# EAGLE board basicUno (EAGLE 6.5.0)
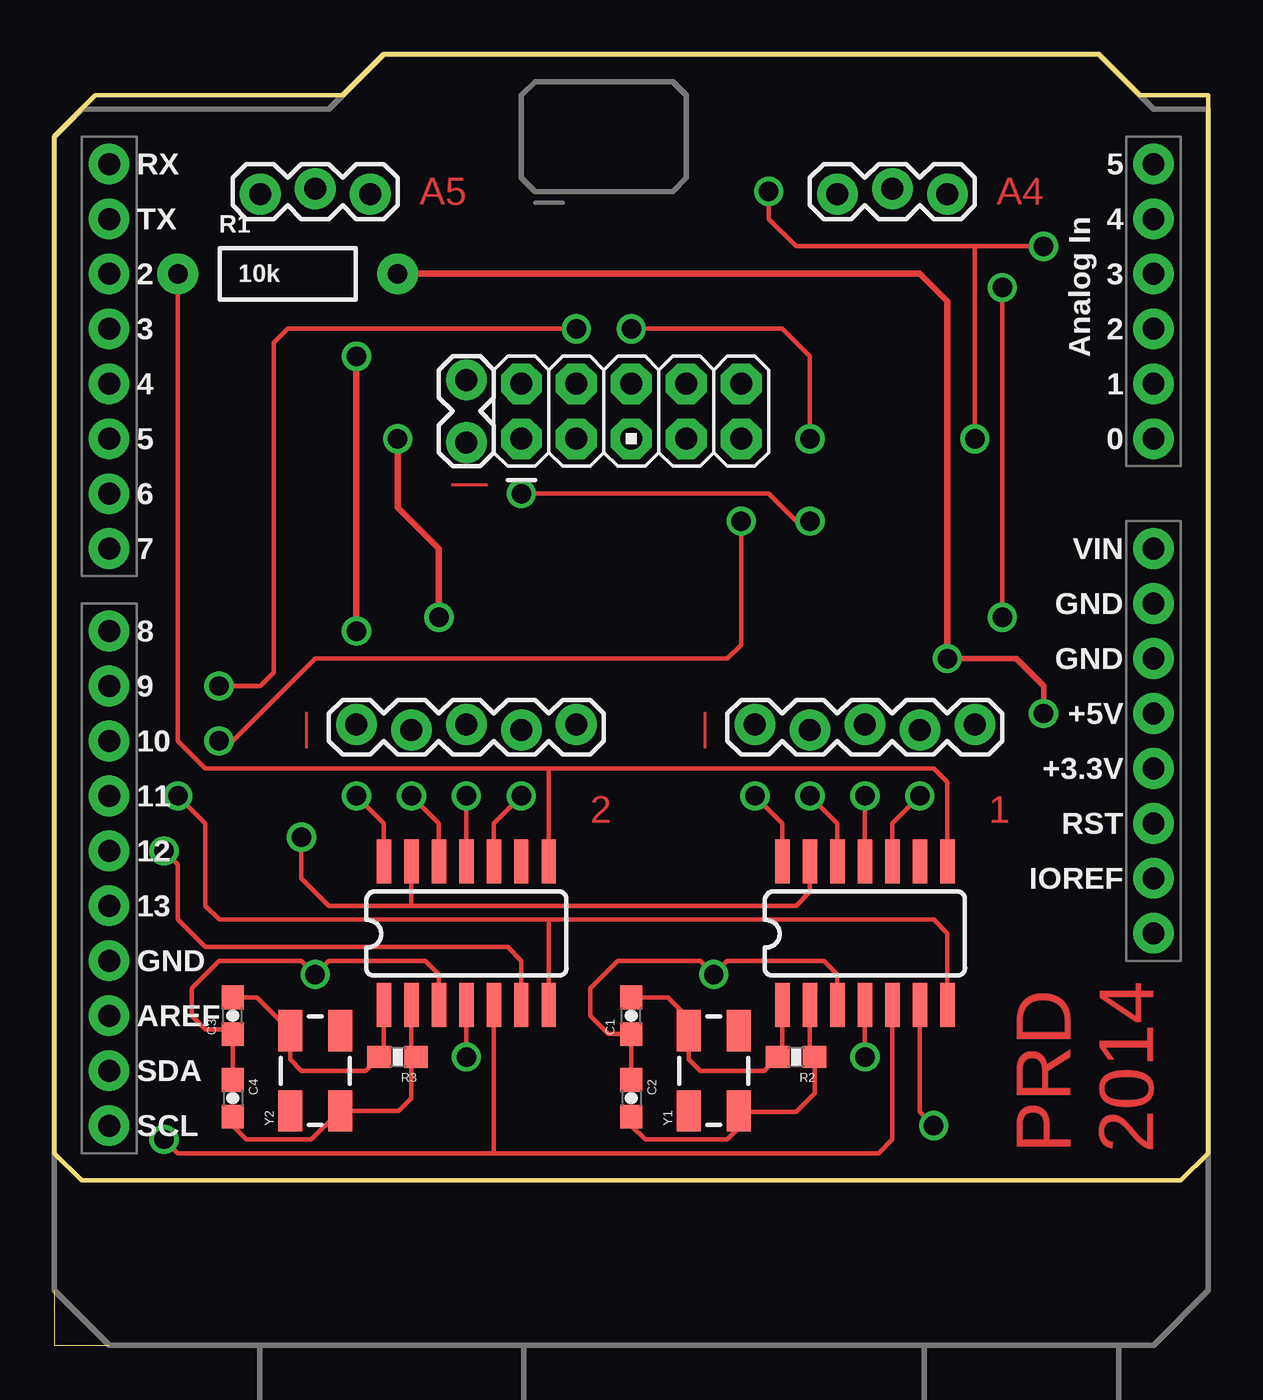
[diagram p0: board, top side]
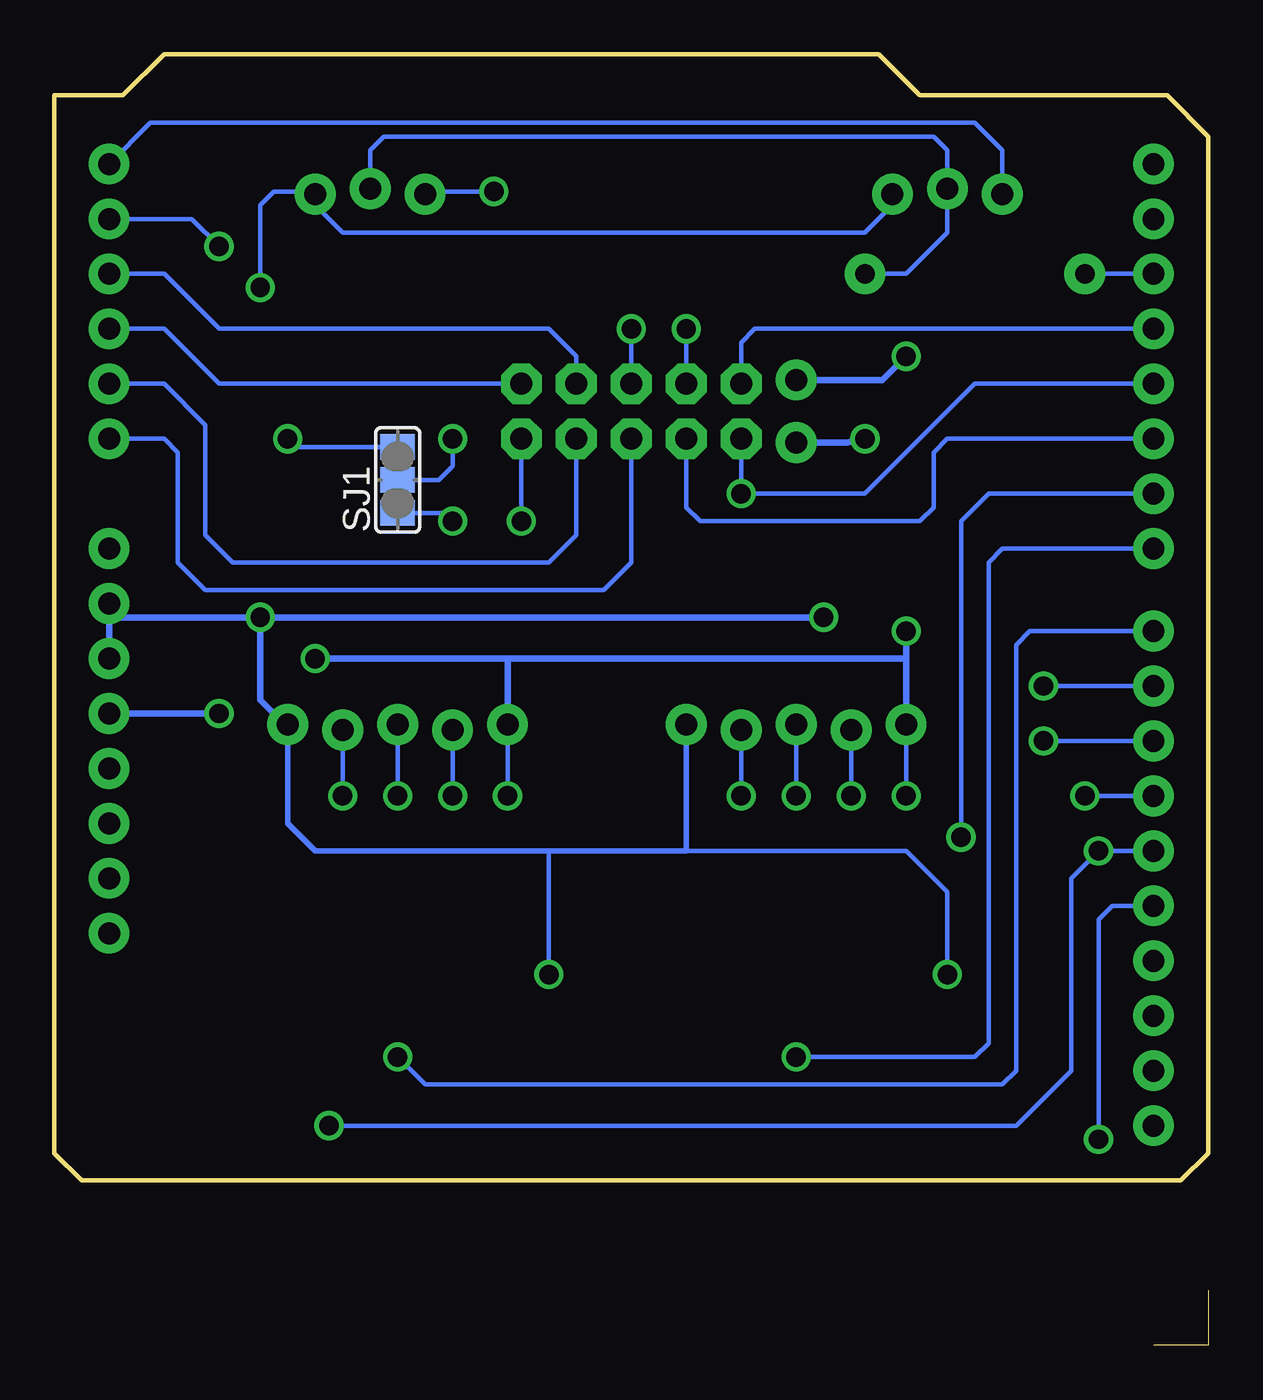
[diagram p1: board, bottom side, seen from below]

Size 53.34 x 59.69 mm. Coordinates in mm from the lower left corner, seen from the top.
Outline: 2.54,0 0,0 0,2.54
Outline: 0,8.89 0,55.88 1.91,57.78 13.34,57.78 15.24,59.69 48.26,59.69 50.16,57.78 53.34,57.78 53.34,8.89 52.07,7.62 1.27,7.62 0,8.89
Copper layers (1*16): Top 0.0356mm / dielectric 1.5011mm / Bottom 0.0356mm
Design rules "oshPark": minimum track width 6mil, minimum drill 13mil, track to track 6mil, track to pad 6mil, pad to pad 6mil, via to via 6mil, smd to smd 6mil, copper to edge 15mil, drill to drill 6mil, minimum pad ring 7mil, minimum via ring 7mil, stop-mask expansion 3mil, vias tented up to drill 0mil, thermal gap 10mil

## Footprints (pad centres in the part's own frame; a part is rotated, then mirrored left to right if it is on the bottom)
0603-CAP = smd 1.1 x 1: 1 -0.85,0; 2 0.85,0
1X05_LOCK = drill 1.016 pad 1.88: 1 0,0.127; 2 2.54,-0.127; 3 5.08,0.127; 4 7.62,-0.127; 5 10.16,0.127
AVR_ICSP = drill 1.016 pad 1.88 octagon: 1 -1.27,5.08; 2 1.27,5.08; 3 -1.27,2.54; 4 1.27,2.54; 5 -1.27,0; 6 1.27,0; 7 -1.27,-2.54; 8 1.27,-2.54; 9 -1.27,-5.08; 10 1.27,-5.08
1X02_LOCK = drill 1.016 pad 1.88: 1 -0.178,0; 2 2.718,0
1X03_LOCK = drill 1.016 pad 1.88: 1 0,0.127; 2 2.54,-0.127; 3 5.08,0.127
AXIAL-0.4 = drill 0.9 pad 1.88: P$1 -5.08,0; P$2 5.08,0
0603-RES = smd 1.1 x 1: 1 -0.85,0; 2 0.85,0
SJ_2 = smd 1.168 x 1.6: 1 -1.524,0; 2 0,0; 3 1.524,0
SOIC14 = smd 2.032 x 0.66: 1 -3.315,4.445; 2 -3.315,3.175; 3 -3.315,1.905; 4 -3.315,0.635; 5 -3.315,-0.635; 6 -3.315,-1.905; 7 -3.315,-3.175; 8 3.315,-3.175; 9 3.315,-1.905; 10 3.315,-0.635; 11 3.315,0.635; 12 3.315,1.905; 13 3.315,3.175; 14 3.315,4.445
UNO_R3_SHIELD = drill 1.016 pad 1.88: 3.3V 50.8,26.67; 5V 50.8,29.21; A0 50.8,41.91; A1 50.8,44.45; A2 50.8,46.99; A3 50.8,49.53; A4 50.8,52.07; A5 50.8,54.61; AREF 2.54,15.24; D2 2.54,49.53; D3 2.54,46.99; D4 2.54,44.45; D5 2.54,41.91; D6 2.54,39.37; D7 2.54,36.83; D8 2.54,33.02; D9 2.54,30.48; D10 2.54,27.94; D11 2.54,25.4; D12 2.54,22.86; D13 2.54,20.32; GND@0 50.8,31.75; GND@1 50.8,34.29; GND@2 2.54,17.78; IOREF 50.8,21.59; NC 50.8,19.05; RES 50.8,24.13; RX 2.54,54.61; SCL 2.54,10.16; SDA 2.54,12.7; TX 2.54,52.07; VIN 50.8,36.83
CRYSTAL-SMD-5X3 = smd 1.9 x 1.1: 1 -1.85,-1.15; 2 1.85,-1.15; 3 1.85,1.15; 4 -1.85,1.15

## Placement (x,y rotation side)
C1  18pF  [0603-CAP]  26.67,15.24 90 top
C2  18pF  [0603-CAP]  26.67,11.43 270 top
C3  18pF  [0603-CAP]  8.26,15.24 90 top
C4  18pF  [0603-CAP]  8.26,11.43 270 top
JP1  EN1  [1X05_LOCK]  32.38,28.57 0 top
JP2  EN2  [1X05_LOCK]  13.97,28.57 0 top
JP3  M05X2PTH  [AVR_ICSP]  26.67,43.18 90 top
JP4  M02LOCK  [1X02_LOCK]  19.05,44.45 270 top
JP5  A4  [1X03_LOCK]  41.27,53.34 180 top
JP6  A5  [1X03_LOCK]  14.61,53.34 180 top
R1  10k  [AXIAL-0.4]  10.79,49.53 0 top
R2  1M  [0603-RES]  34.29,13.34 180 top
R3  1M  [0603-RES]  15.88,13.34 180 top
SJ1  [SJ_2]  37.47,40.01 90 bottom
U$1  LS7366R  [SOIC14]  38.1,19.05 90 top
U$2  LS7366R  [SOIC14]  19.68,19.05 90 top
U$3  ARDUINO_R3_SHIELD  [UNO_R3_SHIELD]  0,0 0 top
Y1  40MHz  [CRYSTAL-SMD-5X3]  30.48,12.7 90 top
Y2  40MHz  [CRYSTAL-SMD-5X3]  12.06,12.7 90 top

## Library data of the parts
C1-C4 R1-R3 SJ1 = SparkFun-Passives
JP1-JP6 = SparkFun-Connectors
U$1 U$2 = dCustom
U$3 = SparkFun-Boards
Y1 Y2 = SparkFun-FreqCtrl

## Nets
5V: JP1.1 JP2.1 JP4.1 JP5.2 JP6.2 R1.P$2 U$1.14 U$2.14 U$3.5V
!FLAG: R1.P$1 U$1.8 U$2.8 U$3.D2
!SS1: U$1.4 U$3.D8
!SS2: U$2.4 U$3.D7
A4: JP5.3 SJ1.3 U$3.A4
A5: JP6.3 U$3.A5
CNT_EN: U$1.13 U$2.13 U$3.D6
GND: C1.1 C2.1 C3.1 C4.1 JP1.5 JP2.5 JP4.2 JP5.1 JP6.1 U$1.3 U$2.3 U$3.GND@0 U$3.GND@1
M1CS: JP3.5 U$3.A0
M1EN: JP3.1 SJ1.1 U$3.D4
M1INA: JP3.2 U$3.D3
M1INB: JP3.3 U$3.D5
M1PWM: JP3.4 U$3.D9
M2CS: JP3.10 U$3.A2
M2EN: JP3.6 SJ1.2
M2INA: JP3.7 U$3.A1
M2INB: JP3.8 U$3.A3
M2PWM: JP3.9 U$3.D10
MISO: U$1.6 U$2.6 U$3.D12
MOSI: U$1.7 U$2.7 U$3.D11
N$1: JP1.2 U$1.12
N$2: JP1.3 U$1.11
N$3: JP1.4 U$1.10
N$5: JP2.2 U$2.12
N$6: JP2.3 U$2.11
N$7: JP2.4 U$2.10
N$8: C1.2 R2.2 U$1.1 Y1.3
N$9: C2.2 R2.1 U$1.2 Y1.1
N$12: C3.2 R3.2 U$2.1 Y2.3
N$13: C4.2 R3.1 U$2.2 Y2.1
SCK: U$1.5 U$2.5 U$3.D13

## Tracks (layer width: path | path; a pad name or v marks a point on that pad's centre or on a via)
5V  (via drill 0.9)
  Top 0.203: v13.97,25.4 15.24,24.13 U$2.14 | v32.38,25.4 33.66,24.13 U$1.14
  Top 0.254: v41.27,31.75 44.45,31.75 45.72,30.48 v45.72,29.21
  Top 0.305: R1.P$2 40.01,49.53 41.27,48.26 v41.27,31.75 | v13.97,45.72 v13.97,33.02
  Bottom 0.203: JP2.1 v13.97,25.4 | JP1.1 v32.38,25.4 | R1.P$2 13.97,49.53 12.06,51.44 JP6.2 12.06,55.24 12.7,55.88 38.1,55.88 38.73,55.24 JP5.2
  Bottom 0.305: JP2.1 13.97,31.75 | 13.97,31.75 v13.97,33.02 | U$3.5V v45.72,29.21 | JP4.1 15.06,44.63 v13.97,45.72 | v41.27,31.75 32.38,31.75 | 32.38,31.75 13.97,31.75 | JP1.1 32.38,31.75
!FLAG
  Top 0.203: R1.P$1 5.71,27.94 6.99,26.67 22.86,26.67 | U$1.8 41.27,26.04 40.64,26.67 22.86,26.67 | U$2.8 22.86,26.67
  Bottom 0.203: R1.P$1 U$3.D2
!SS1  (via drill 0.9)
  Top 0.203: U$1.4 v37.47,13.34
  Bottom 0.203: U$3.D8 8.26,33.02 8.89,32.38 8.89,12.7 9.53,12.06 36.2,12.06 v37.47,13.34
!SS2  (via drill 0.9)
  Top 0.203: U$2.4 v19.05,13.34
  Bottom 0.203: U$3.D7 9.53,36.83 10.16,36.2 10.16,13.97 10.79,13.34 v19.05,13.34
A4  (via drill 0.9)
  Top 0.203: v45.72,50.8 42.55,50.8 | 42.55,50.8 34.29,50.8 33.02,52.07 v33.02,53.34 | v42.55,41.91 42.55,50.8
  Bottom 0.203: U$3.A4 46.99,52.07 v45.72,50.8 | v33.02,53.34 36.07,53.34 JP5.3 | SJ1.3 42.16,41.53 v42.55,41.91
A5
  Bottom 0.203: JP6.3 9.53,55.24 10.79,56.52 48.9,56.52 U$3.A5
CNT_EN  (via drill 0.9)
  Top 0.203: 16.51,20.32 34.29,20.32 34.92,20.95 U$1.13 | U$2.13 16.51,20.32 | 16.51,20.32 12.7,20.32 11.43,21.59 v11.43,23.5
  Bottom 0.203: v11.43,23.5 11.43,38.1 10.16,39.37 U$3.D6
GND  (via drill 0.9)
  Top 0.203: v43.81,48.9 v43.81,33.66 | 36.2,16.51 U$1.3 36.2,17.14 35.56,17.78 31.11,17.78 v30.48,17.14 29.84,17.78 26.04,17.78 24.77,16.51 24.77,15.24 25.61,14.39 C1.1 C2.1 | C4.1 C3.1 8.04,14.61 6.99,14.61 6.35,15.24 6.35,16.51 7.62,17.78 11.43,17.78 v12.06,17.14 12.7,17.78 17.14,17.78 17.78,17.14 U$2.3
  Top 0.305: v15.88,41.91 15.88,38.73 17.78,36.83 v17.78,33.66
  Bottom 0.203: JP6.1 14.61,52.7 15.88,51.44 40.01,51.44 41.27,52.7 JP5.1 41.4,53.34 43.18,53.34 43.81,52.7 v43.81,48.9 | v12.06,17.14 12.06,20.95 13.97,22.86 24.13,22.86 | v30.48,17.14 30.48,22.86
  Bottom 0.254: JP1.5 42.55,24.13 41.27,22.86 30.48,22.86 24.13,22.86 JP2.5
  Bottom 0.305: v17.78,33.66 v43.81,33.66 | 50.8,33.66 U$3.GND@0 | JP4.2 16.69,41.73 v15.88,41.91 | JP1.5 42.67,28.7 43.81,29.84 v43.81,33.66 | U$3.GND@1 50.8,33.66 | 50.8,33.66 v43.81,33.66
M1CS
  Bottom 0.203: U$3.A0 48.26,41.91 47.62,41.27 47.62,36.2 46.35,34.92 27.94,34.92 26.67,36.2 JP3.5
M1EN  (via drill 0.9)
  Top 0.203: v34.92,38.1 34.29,38.1 33.02,39.37 v21.59,39.37
  Bottom 0.203: U$3.D4 10.79,44.45 15.88,39.37 v21.59,39.37 JP3.1 | SJ1.1 35.31,38.48 v34.92,38.1
M1INA
  Bottom 0.203: JP3.2 21.59,46.35 20.95,46.99 U$3.D3
M1INB
  Bottom 0.203: U$3.D5 12.06,41.91 12.7,41.27 12.7,38.73 13.34,38.1 23.5,38.1 24.13,38.73 JP3.3
M1PWM  (via drill 0.9)
  Top 0.203: v7.62,30.48 9.53,30.48 10.16,31.11 10.16,46.35 10.79,46.99 v24.13,46.99
  Bottom 0.203: U$3.D9 v7.62,30.48 | JP3.4 v24.13,46.99
M2CS
  Bottom 0.203: U$3.A2 48.26,46.99 45.72,44.45 JP3.10
M2EN  (via drill 0.9)
  Top 0.203: v26.67,46.99 33.66,46.99 34.92,45.72 v34.92,41.91
  Bottom 0.203: JP3.6 v26.67,46.99 | v34.92,41.91 34.92,40.64 35.56,40.01 SJ1.2 37.47,38.73
M2INA
  Bottom 0.203: JP3.7 29.21,37.47 30.48,36.2 45.09,36.2 46.35,37.47 46.35,42.55 48.26,44.45 U$3.A1
M2INB
  Bottom 0.203: JP3.8 29.21,45.72 30.48,46.99 45.72,46.99 48.26,49.53 U$3.A3
M2PWM  (via drill 0.9)
  Top 0.203: v7.62,27.94 8.26,27.94 12.06,31.75 31.11,31.75 31.75,32.38 v31.75,38.1
  Bottom 0.203: U$3.D10 v7.62,27.94 | v31.75,38.1 JP3.9
MISO  (via drill 0.9)
  Top 0.203: U$2.6 21.59,17.78 20.95,18.41 6.99,18.41 5.71,19.68 5.71,22.23 v5.08,22.86 | U$1.6 40.01,10.79 v40.64,10.16
  Bottom 0.203: U$3.D12 v5.08,22.86 6.35,21.59 6.35,12.7 8.89,10.16 v40.64,10.16
MOSI  (via drill 0.9)
  Top 0.203: v5.71,25.4 6.99,24.13 6.99,20.32 7.62,19.68 22.86,19.68 | 22.86,19.68 40.64,19.68 41.27,19.05 U$1.7 | 22.86,19.68 U$2.7
  Bottom 0.203: U$3.D11 v5.71,25.4
N$1  (via drill 0.9)
  Top 0.203: v34.92,25.4 36.2,24.13 U$1.12
  Bottom 0.203: JP1.2 v34.92,25.4
N$2  (via drill 0.9)
  Top 0.203: v37.47,25.4 U$1.11
  Bottom 0.203: JP1.3 v37.47,25.4
N$3  (via drill 0.9)
  Top 0.203: v40.01,25.4 38.73,24.13 U$1.10
  Bottom 0.203: JP1.4 v40.01,25.4
N$5  (via drill 0.9)
  Top 0.203: v16.51,25.4 17.78,24.13 U$2.12
  Bottom 0.203: JP2.2 v16.51,25.4
N$6  (via drill 0.9)
  Top 0.203: v19.05,25.4 U$2.11
  Bottom 0.203: JP2.3 v19.05,25.4
N$7  (via drill 0.9)
  Top 0.203: v21.59,25.4 20.32,24.13 U$2.10
  Bottom 0.203: JP2.4 v21.59,25.4
N$8
  Top 0.203: U$1.1 33.66,13.55 R2.2 32.8,12.7 29.84,12.7 29.33,13.21 Y1.3 29.21,14.67 29.21,15.24 28.36,16.09 C1.2
N$9
  Top 0.203: U$1.2 34.92,13.55 R2.1 35.14,11.64 34.29,10.79 31.68,10.79 Y1.1 31.75,10.73 31.75,10.16 31.11,9.53 27.3,9.53 26.67,10.16 C2.2
N$12
  Top 0.203: U$2.1 15.24,13.55 R3.2 14.39,12.7 11.43,12.7 10.91,13.21 Y2.3 9.38,16.09 C3.2
N$13
  Top 0.203: U$2.2 16.51,13.55 R3.1 16.51,13.12 16.51,11.43 15.93,10.85 Y2.1 11.89,9.53 8.89,9.53 8.26,10.16 C4.2
SCK  (via drill 0.9)
  Top 0.203: 20.32,8.89 38.1,8.89 38.73,9.53 U$1.5 | U$2.5 20.32,8.89 | v5.08,9.53 5.71,8.89 20.32,8.89
  Bottom 0.203: U$3.D13 4.45,20.32 5.08,19.68 v5.08,9.53

## Text on the board
Top: | | | | | | 2 | 1 | PRD / 2014
Reference: This is intentional / DRC will complain here but it / was the best way to keep the / labels consistent and / understandable.